# Altium PCB 2014-09-02_06-20-26.PcbDoc
Units mil, origin at the board's own origin, x right, y up, seen from the top; angles counter-clockwise.
Board outline 2000 x 2400 mil, 4 copper layers (Top Layer, MidLayer1, MidLayer2, Bottom Layer); 18 components, 8 nets, 41 pads, 72 vias.
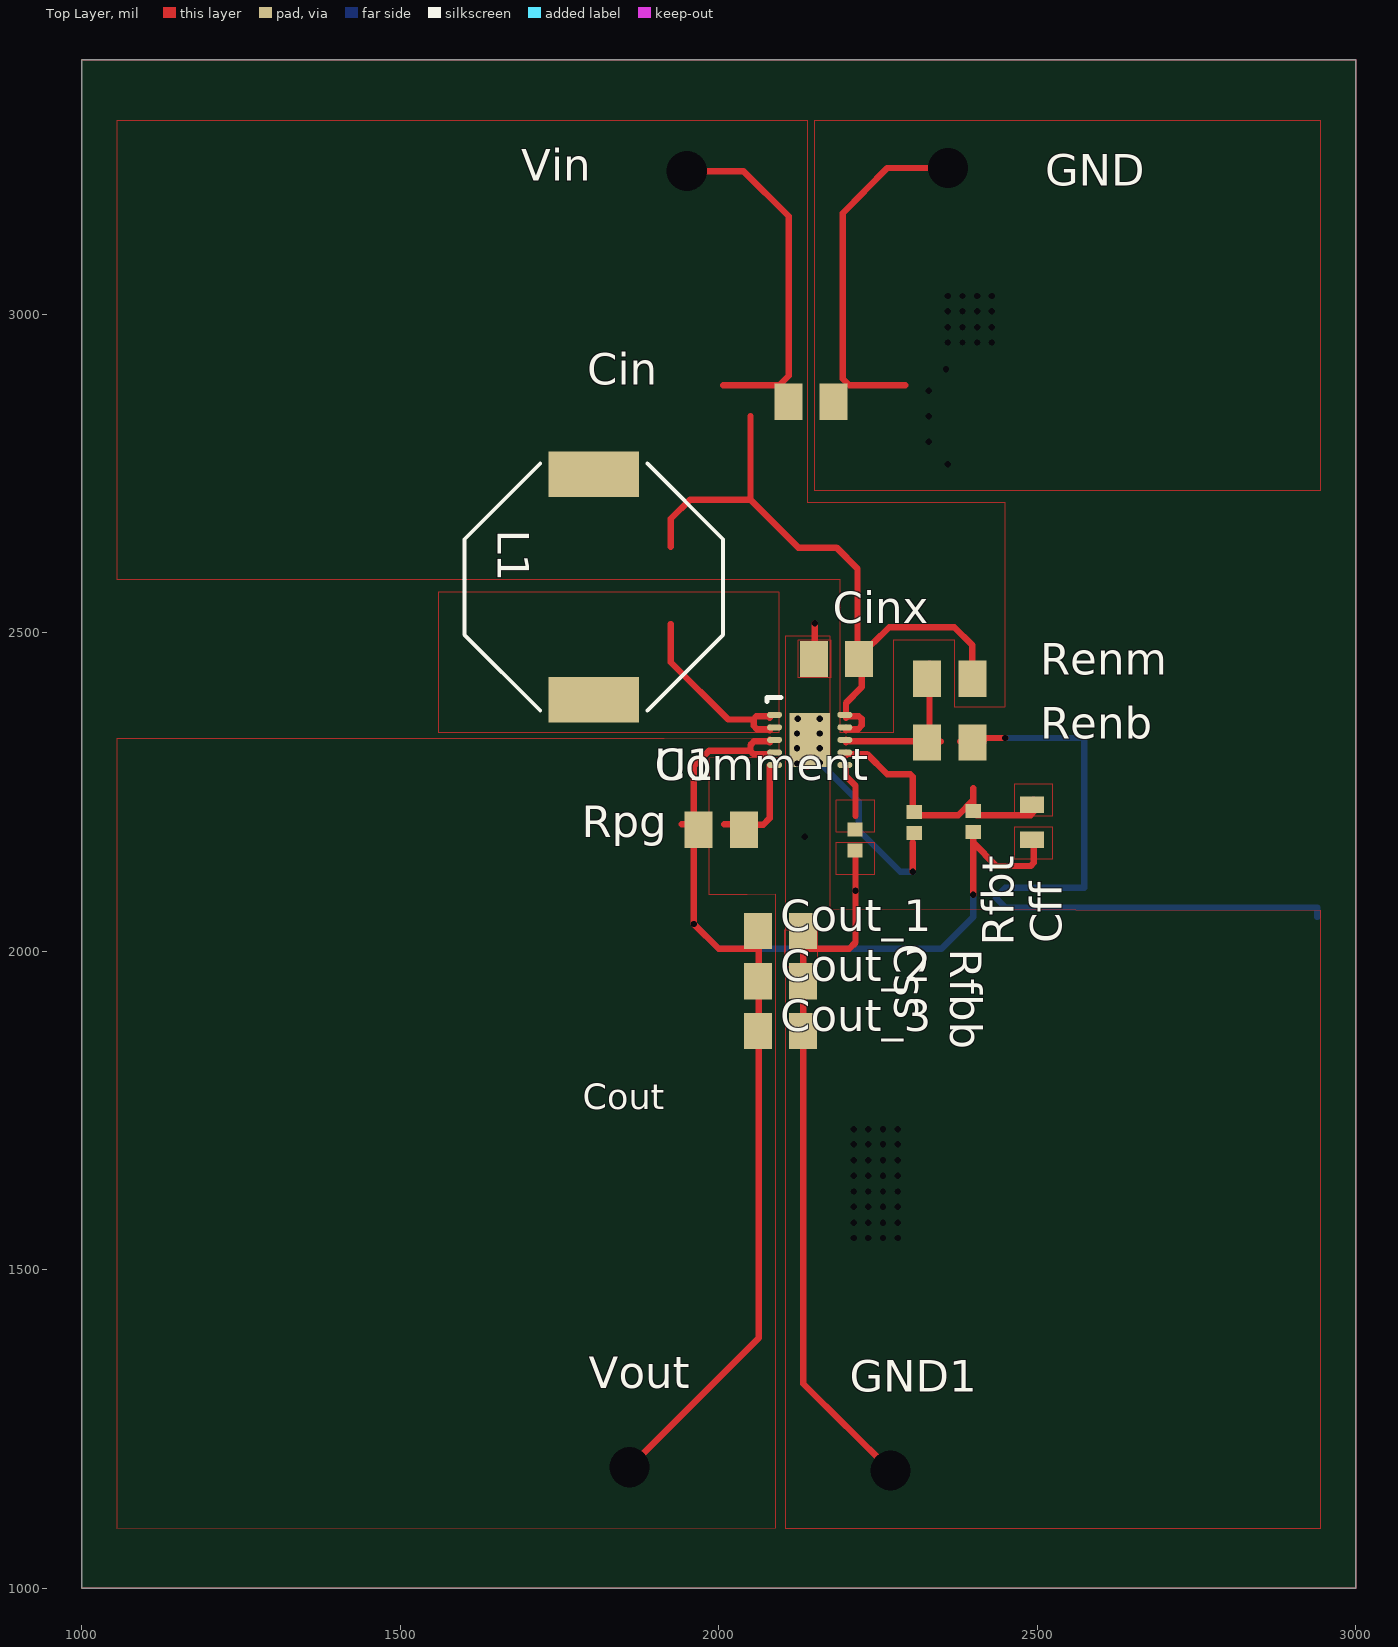
[diagram p0: Top Layer view]
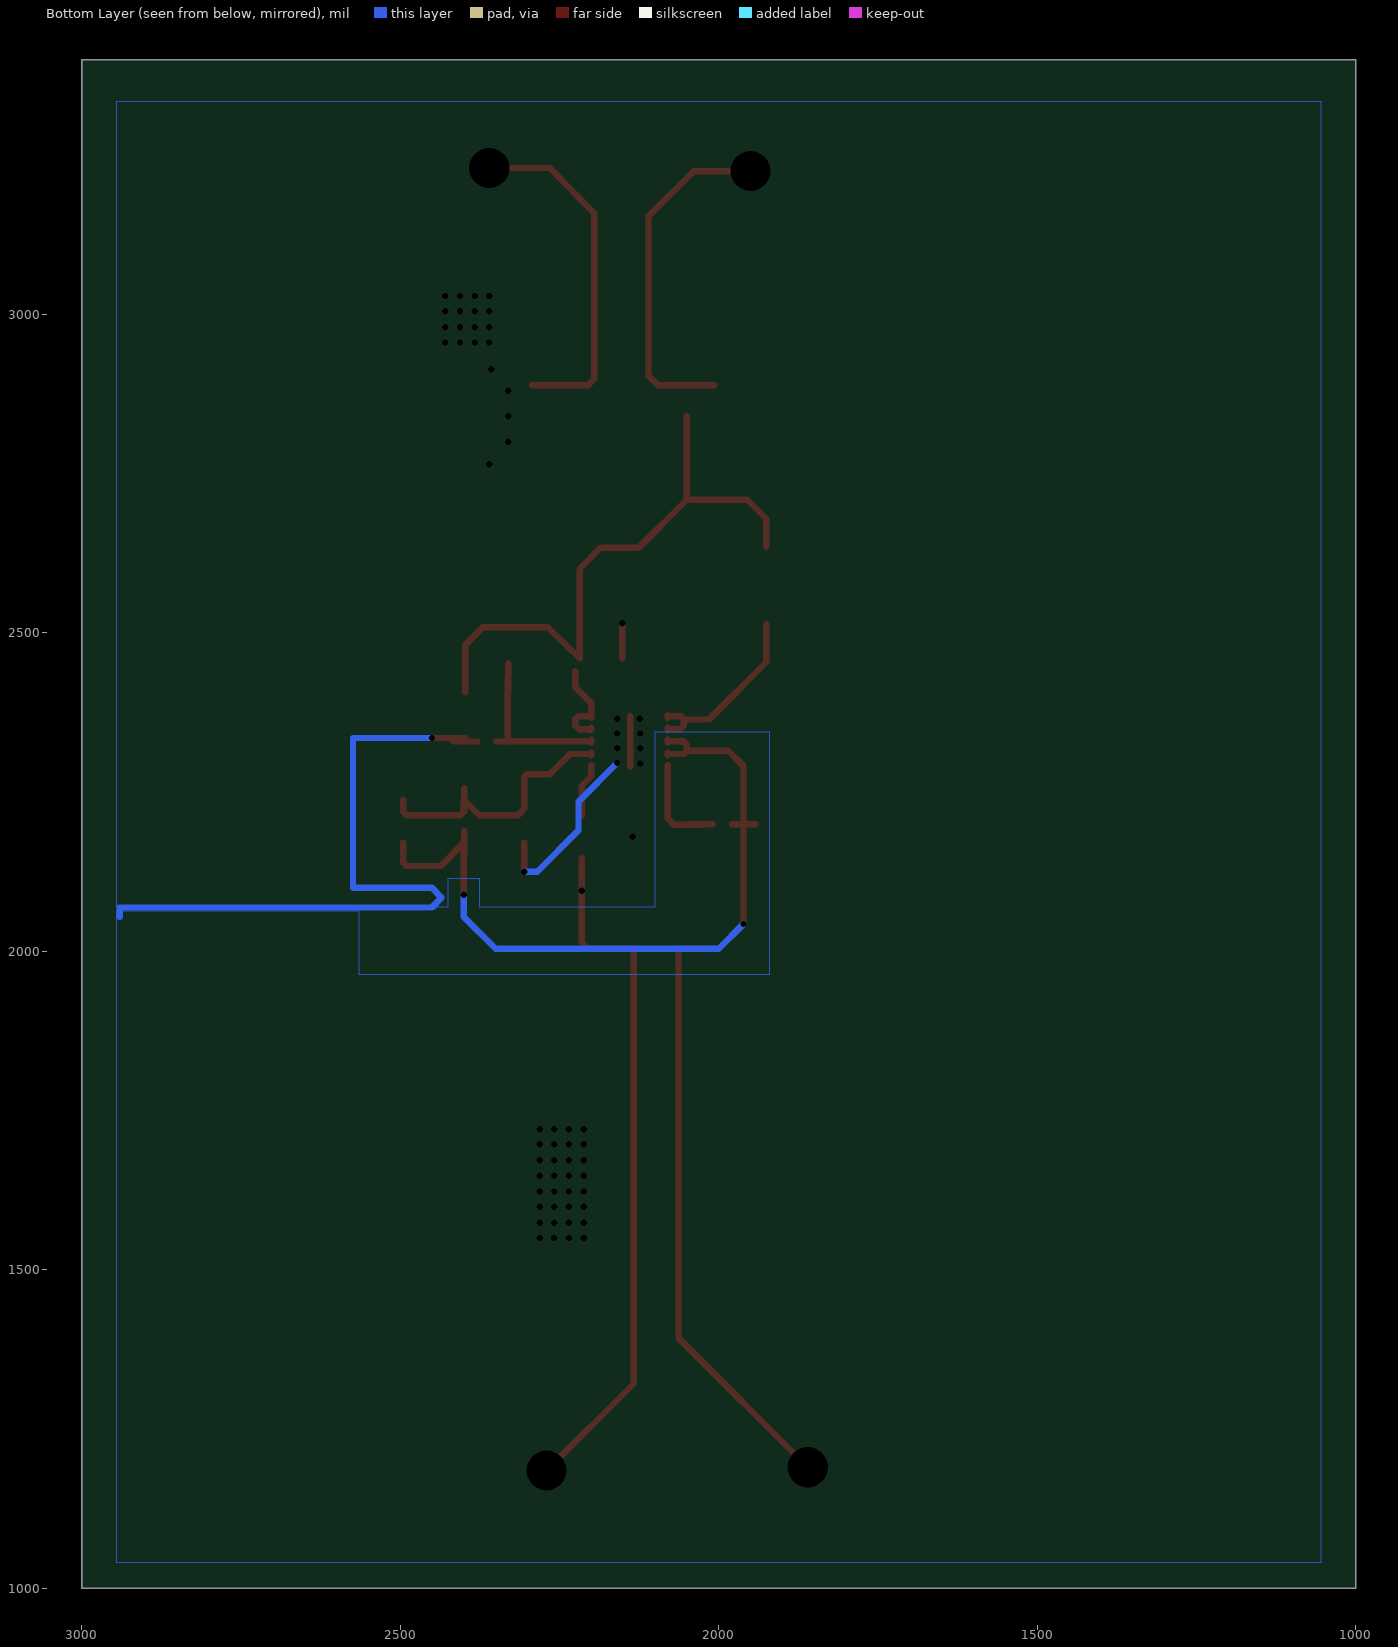
[diagram p1: Bottom Layer view, seen from below]

## Layer stack, top to bottom
Top Layer: signal copper 1.4
Dielectric: core 12.6, FR-4, Dk 4.8
MidLayer1: signal copper 1.4
Dielectric: prepreg 12.6, FR-4, Dk 4.8
MidLayer2: signal copper 1.4
Dielectric: core 12.6, FR-4, Dk 4.8
Bottom Layer: signal copper 1.4

## Board outline
1000,1000 3000,1000 3000,3400 1000,3400

## Design rules (kind name [scope] priority, off if disabled: settings)
PlaneConnect [All] p0: scope1count=1 scope1_0_kind=Board scope1_0_value=Board scope2count=1 scope2_0_kind=Board scope2_0_value=Board commentlength=0 planeconnectstyle=Direct reliefexpansion=20 reliefentries=4 reliefconductorwidth=10 reliefairgap=10
PlaneConnect [All] p1: planeconnectstyle=Direct reliefexpansion=20 reliefentries=4 reliefconductorwidth=10 reliefairgap=10
PolygonConnect [All] p0: scope1count=1 scope1_0_kind=Board scope1_0_value=Board scope2count=1 scope2_0_kind=Board scope2_0_value=Board commentlength=0 connectstyle=Direct reliefconductorwidth=10 reliefentries=4 polygonreliefangle="90 Angle"
PolygonConnect [All] p1: connectstyle=Direct reliefconductorwidth=10 reliefentries=4 polygonreliefangle="90 Angle"

## Components (designator, comment, footprint, x,y, rotation, side; value= is the part's Value field where it differs from the comment)
Cff "" 0603 2492,2203 r90 top
Cin "" 0805 2145,2863 r0 top
Cinx "" 0805 2185,2459 r0 top
Cout_1 "" 0805 2097,2032 r0 top
Cout_2 "" 0805 2097,1953 r0 top
Cout_3 "" 0805 2097,1875 r0 top
Css "" 0402 2214,2175 r270 top
GND "" TP-1502 2358,3228 r0 top
GND1 "" TP-1502 2269,1185 r0 top
L1 "" SRU1028 1804,2572 r270 top
Renb "" 0805 2363,2328 r0 top
Renm "" 0805 2363,2428 r0 top
Rfbb "" 0402 2307,2202 r270 top
Rfbt "" 0402 2400,2204 r90 top
Rpg "" 0805 2004,2191 r0 top
U1 "" DRC0010G 2143,2332 r0 top
Vin "" TP-1502 1948,3223 r0 top
Vout "" TP-1502 1858,1188 r0 top

## Footprints (in the part's own frame and the unit in brackets; to place one, negate y for a bottom-side part, rotate by r counter-clockwise, add the part's x,y. Pads: shape width x height; smd on the part's side, far side on the other; paste and mask are expansions set on the pad)
0402 [mil]
  rect 22x24 smd: 1(-16.5,0) 2(16.5,0)
0603 [mil]
  rect 26x38 smd: 1(-27.5,0) 2(27.5,0)
0805 [mil]
  rect 44x57 smd: 1(-35.5,0) 2(35.5,0)
DRC0010G [mm]
  oval 0.6x0.24 smd: 1(-1.4,1) 2(-1.4,0.5) 3(-1.4,0) 4(-1.4,-0.5) 5(-1.4,-1) 6(1.4,-1) 7(1.4,-0.5) 8(1.4,0) 9(1.4,0.5) 10(1.4,1)
  rect 1.6x2.15 smd: 11(0,0)
  silkscreen extent -1.7,1.54 -1.15,1.7
SRU1028 [mil]
  rect 71x142 smd: 1(-177,0) 2(177,0)
  silkscreen extent -194,-203 194,203
TP-1502 [mil]
  round 0 hole 32: 1(0,0)

## Via types
v1: diameter 0, hole 10, Top Layer to Bottom Layer, 68 vias
v2: diameter 0, hole 63, Top Layer to Bottom Layer, 4 vias

## Nets (pads, with @x,y where several pads share a name; then routed paths per layer and width w, separated by ;. In a path a pad name is that pad's centre, name@x,y a point inside that pad or via, vN(x,y) a via of type N, cw(c..) or ccw(c..) an arc to the next point about the centre after c; other vN are vias at no path point)
0: Cin.2 Cinx.1 Cout_1.2 Cout_2.2 Cout_3.2 Css.2 GND1.1 GND.1 Renb.2 Rfbb.2 U1.11 | length 3235.4
  Top Layer w10: Cout_1.2@2130,2004 Cout_1.2@2133,2004 ; U1.11@2139,2290 U1.11@2139,2369 ; Cinx.1@2151,2460 v1(2151,2515) ; 2215,2146 v1(2215,2095) 2215,2014 2205,2004 Cout_1.2@2133,2004 ; 2217,2889 2293,2889 ; 2255,2889 2205,2889 2195,2899 2195,3159 2265,3230 v2(2360,3230) ; v2(2270,1185) 2133,1321 Cout_1.2@2133,2004 ; v1(2305,2125) 2305,2171 ; Renb.2@2379,2329.5 Renb.2@2416,2329.5 ; Renb.2@2398,2335 v1(2450,2335)
  Bottom Layer w10: v1(2159,2296) 2220,2235 2220,2190 2285,2125 v1(2305,2125) ; v1(2450,2335) 2574,2335 2574,2100 2450,2100 2435,2084 2450,2069 2940,2069 2940,2054
  other v1: 2212,1550 2235,1550 2258,1550 2281,1550 2212,1574 2235,1574 2258,1574 2281,1574 2212,1599 2235,1599 2258,1599 2281,1599 2212,1623 2235,1623 2258,1623 2281,1623 2212,1648 2235,1648 2258,1648 2281,1648 2212,1672 2235,1672 2258,1672 2281,1672 2212,1697 2235,1697 2258,1697 2281,1697 2212,1721 2235,1721 2258,1721 2281,1721 2135,2180 2123,2295 2123,2319 2159,2319 2123,2342 2159,2342 2124,2365 2159,2365 2360,2765 2330,2800 2330,2840 2330,2880 2357,2914 2360,2956 2383,2956 2406,2956 2429,2956 2360,2980 2383,2980 2406,2980 2429,2980 2360,3005 2383,3005 2406,3005 2429,3005 2360,3029 2383,3029 2406,3029 2429,3029
1: Cin.1 Cinx.2 L1.1 Renm.2 U1.9 U1.10 Vin.1 | length 1714.6
  Top Layer w10: 1925,2635 1925,2679 1955,2709 2050,2709 ; v2(1950,3225) 2039,3225 2110,3154 2110,2904 2095,2889 2045,2889 ; 2007,2889 2083,2889 ; 2050,2840 2050,2709 ; U1.9@2200,2347 U1.9@2200,2351 ; U1.9@2200,2349 2219,2349 2225,2355 2225,2365 2220,2369 2200,2369 2200,2390 2225,2415 Cinx.2@2225,2440 ; U1.10@2200,2367 U1.10@2200,2371 ; Renm.2@2397.5,2407 Renm.2@2397.5,2452 ; Renm.2@2398,2429 2398,2481 2370,2509 2268,2509 2218,2460 2218,2601 2185,2634 2125,2634 2050,2709
2: Cff.2 Rfbb.1 Rfbt.2 U1.7 | length 457.1
  Top Layer w10: U1.7@2200,2308 U1.7@2200,2312 ; U1.7@2200,2310 2233,2310 2265,2278 2301,2278 2305,2274 2305,2238 2305,2224 2315,2214 2376,2214 2400,2238 2400,2219 2405,2214 2490,2214 2495,2219 Cff.2@2495,2238 ; Rfbt.2@2399.5,2219 2399.5,2256
6: Cff.1 Cout_1.1 Cout_2.1 Cout_3.1 Rfbt.1 Rpg.1 U1.3 U1.4 Vout.1 | length 2257.2
  Top Layer w10: v2(1860,1190) 2063,1393 2063,2004 2000,2004 v1(1961,2043) 1961,2199 1961,2291 1985,2315 2050,2315 ; 1942,2199.5 Rpg.1@1979,2199.5 ; U1.4@2080,2308 U1.4@2080,2312 ; U1.4@2080,2310 2054,2310 2050,2315 ; U1.3@2080,2328 U1.3@2080,2332 ; U1.3@2080,2330 2055,2330 2055,2329 2050,2324 2050,2315 ; 2399.5,2152 Rfbt.1@2399.5,2189 ; v1(2400,2089) 2400,2171 2436,2134 2490,2134 2495,2139 Cff.1@2495,2171
  Bottom Layer w10: v1(1961,2043) 2000,2004 2350,2004 2400,2054 v1(2400,2089)
8: Renb.1 Renm.1 U1.8 | length 317
  Top Layer w10: U1.8@2200,2328 U1.8@2200,2332 ; U1.8@2200,2330 Renb.1@2331,2330 ; Renb.1@2312,2329.5 Renb.1@2349,2329.5 ; Renm.1@2330.5,2407 Renm.1@2330.5,2452 ; Renb.1@2331,2329 Renm.1@2331,2429
9: Css.1 U1.6 | length 87.2
  Top Layer w10: U1.6@2200,2288 U1.6@2200,2292 ; U1.6@2200,2290 2200,2275 2215,2260 2215,2213
10: Rpg.2 U1.5 | length 178.1
  Top Layer w10: 2009,2199.5 Rpg.2@2046,2199.5 ; Rpg.2@2028,2199 2070,2199 2080,2209 U1.5@2080,2290 ; U1.5@2080,2288 U1.5@2080,2292
13: L1.2 U1.1 U1.2 | length 299.8
  Top Layer w10: 1925,2514 1925,2454 2015,2364 2055,2364 ; 2080,2347 U1.2@2080,2351 ; U1.2@2080,2349 2060,2349 2055,2354 2055,2364 ; U1.1@2080,2367 U1.1@2080,2371 ; U1.1@2080,2369 2059,2369 2055,2364

## Polygon pours and split planes (outlines as drawn)
0 on Bottom Layer " " (solid, pour order 9): 2945,3335 1055,3335 1055,1040 2945,1040 2945,2064 2565,2064 2565,1964 1920,1964 1920,2344 2100,2344 2100,2069 2375,2069 2375,2114 2425,2114 2425,2069 2945,2069
9 on Top Layer " " (solid, pour order 0): 2185,2187 2185,2238 2244,2238 2244,2187
2 on Top Layer " " (solid, pour order 1): 2465,2212 2465,2263 2524,2263 2524,2212
6 on Top Layer " " (solid, pour order 2): 2465,2145 2465,2196 2524,2196 2524,2145
13 on Top Layer " " (solid, pour order 3): 2095,2344 2095,2564 1560,2564 1560,2344
1 on Top Layer " " (solid, pour order 4): 2275,2344 2275,2489 2370,2489 2370,2384 2450,2384 2450,2704 2140,2704 2140,3304 1055,3304 1055,2584 2190,2584 2190,2344
6 on Top Layer " " (solid, pour order 5): 2095,2335 1915,2334 1055,2334 1055,1094 2090,1095 2090,2090 2045,2089 1985,2089 1985,2304 2045,2305 2095,2305
0 on Top Layer " " (solid, pour order 6): 2185,2120 2185,2171 2244,2171 2244,2120
0 on Top Layer " " (solid, pour order 7): 2104,1975 2104,2034 2155,2034 2155,1975
0 on Top Layer " " (solid, pour order 8): 2125,2430 2125,2489 2176,2489 2176,2430
0 on Top Layer " " (solid, pour order 10): 2945,3304 2150,3304 2150,2724 2945,2724
0 on Top Layer " " (solid, pour order 11): 2105,2495 2105,1094 2945,1094 2945,2064 2175,2065 2175,2495

## Other copper
Multi-Layer:
  the board outline again, w1

## Silkscreen, mask and mechanical layers (free items; w line width, h text height)
Top Overlay:
  text "Cout" at 1787,1752 h40

## Text inside footprints (layer, text, board x,y; h text height)
U1: Top Overlay "Comment" at 1900,2269 h50